# Altium PCB Main_PCB.PcbDoc
Units mm, origin at the board's own origin, x right, y up, seen from the top; angles counter-clockwise.
Board outline 54.99 x 41.53 mm, 2 copper layers (Top Layer, Bottom Layer); 25 components, 26 nets, 192 pads, 0 vias.
Unrouted connection lines stored in the file: 25.
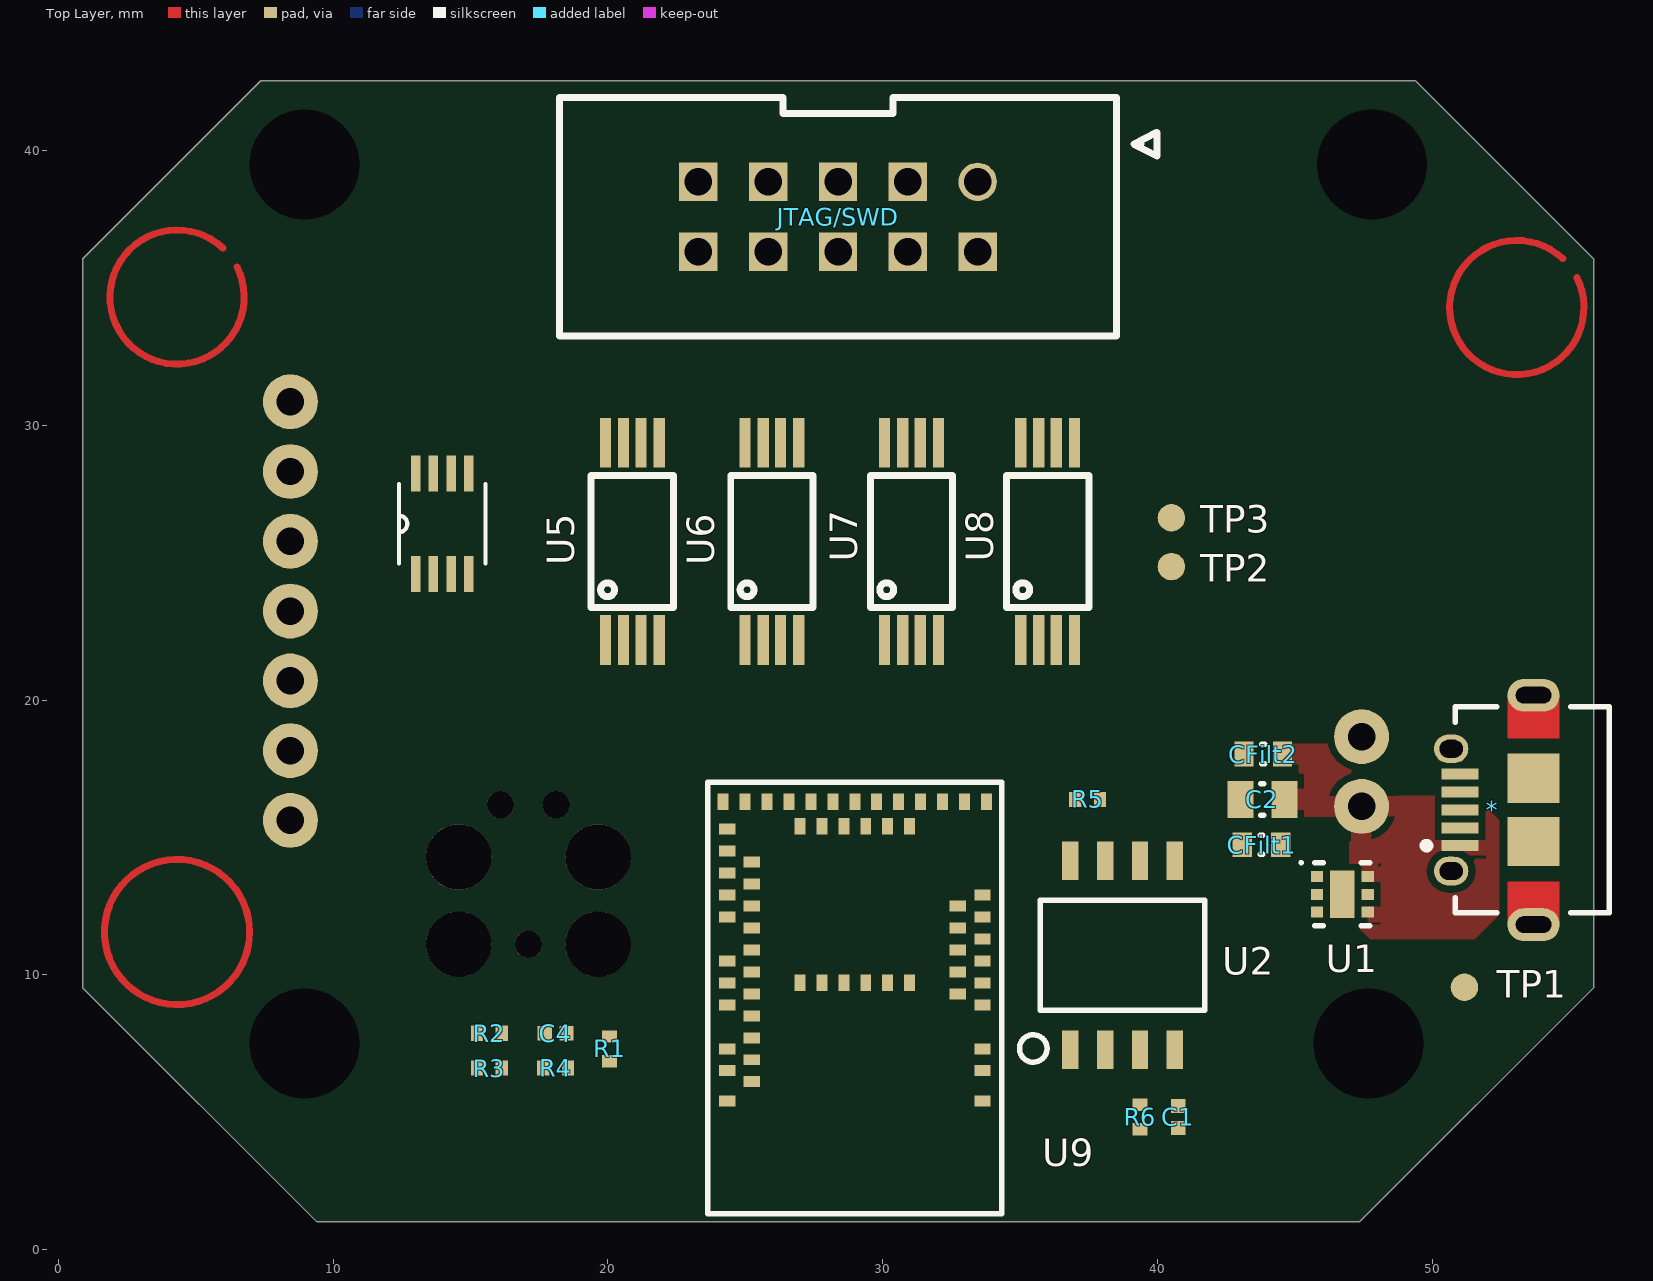
[diagram p0: Top Layer view]
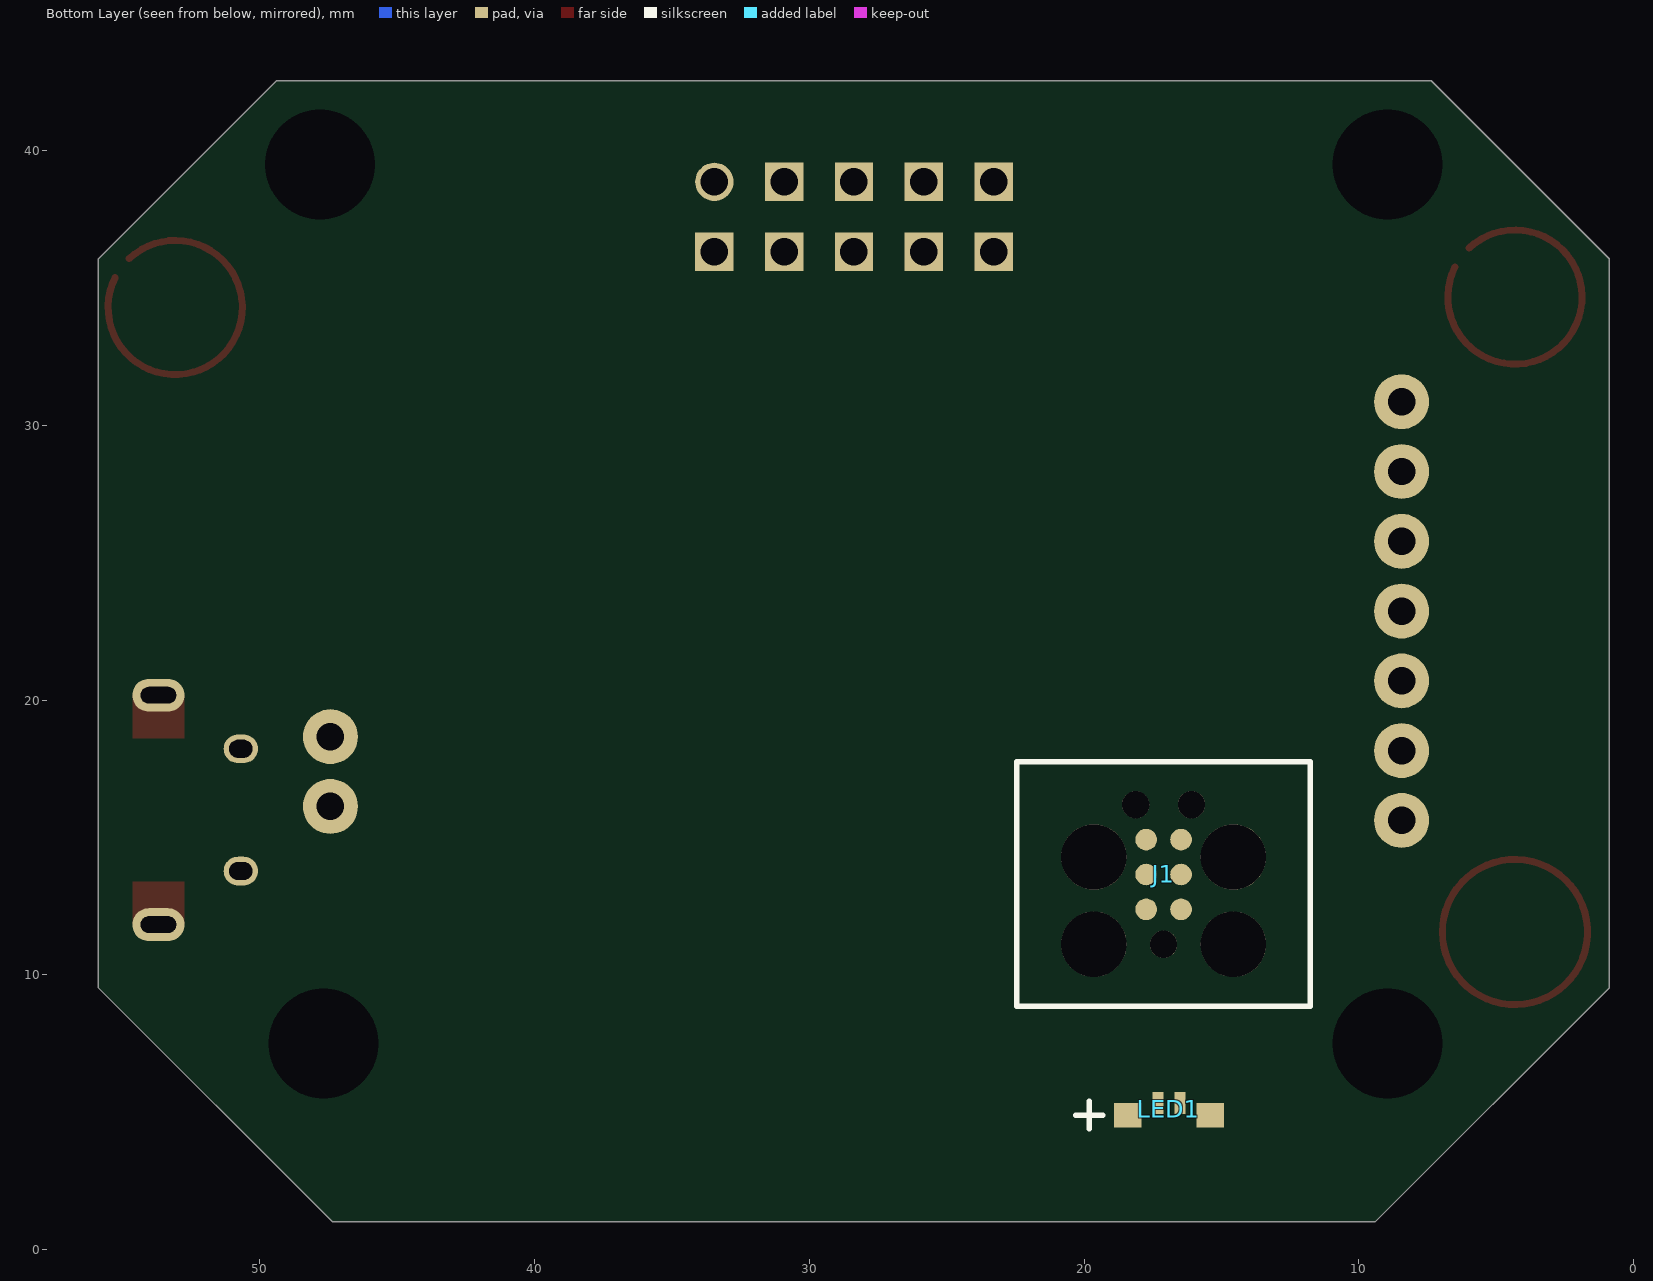
[diagram p1: Bottom Layer view, seen from below]

## Layer stack, top to bottom
Top Solder: solder mask 0.0102, Solder Resist, Dk 3.5
Top Layer: signal copper 0.0356
Dielectric 1: dielectric 0.32, FR-4, Dk 4.8
Bottom Layer: signal copper 0.0356
Bottom Solder: solder mask 0.0102, Solder Resist, Dk 3.5

## Board outline
0.889,9.525 9.398,1.016 47.371,1.016 55.88,9.525 55.88,36.068 49.403,42.545 7.366,42.545 0.889,36.068

## Design rules (kind name [scope] priority, off if disabled: settings)
Clearance [All] p1: gap=0.254 ignorepadtopadclearanceinfootprint=TRUE except(0: Arc-Hole Track-Hole SMDPad-Hole THPad-Hole Via-Hole Fill-Hole Poly-Hole Region-Hole Text-Hole)
PlaneConnect [All] p1: planeconnectstyle=Relief reliefexpansion=0.508 reliefentries=4 reliefconductorwidth=0.75 reliefairgap=0.254
PolygonConnect [All] p1: connectstyle=Relief reliefconductorwidth=0.75 reliefentries=4 polygonreliefangle="90 Angle" airgapwidth=0.254
RoutingVias [All] p1: holewidth=0.711 width=1.27 viastyle="Through Hole" minholewidth=0.711 minwidth=1.27 maxholewidth=0.711 maxwidth=1.27
SolderMaskExpansion [All] p1: expansion=0.102
Width [All] p1: maxlimit=0.254 minlimit=0.254 preferedwidth=0.254
29 further rules are at their usual default settings.

## Classes and differential pairs
component class Main_Schematic: * C1 C2 C4 CFilt1 CFilt2 J1 LED1 R1 R2 R3 R4 R5 R6 TP1 U1 U2

## Components (designator, comment, footprint, x,y, rotation, side; value= is the part's Value field where it differs from the comment)
* "CONN RCPT MICRO USB AB R/A SMD" "PCB MOUNT MICRO USB" 52.197,16.002 r90 top value="MICRO USB"
C1 "CAP CER 0.1UF 25V X7R 0402" "0402 Capacitor, IPC High" 40.767,4.826 r90 top value=100nF
C2 "CAP CER 4.7UF 50V X5R 0805" "0805 Capacitor, IPC High" 43.823,16.389 r180 top value=4.7uF
C4 "CAP CER 0.1UF 25V X7R 0402" "0402 Capacitor, IPC High" 18.097,7.874 r180 top value=100nF
CFilt1 "CAP CER 1UF 25V X5R 0603" "0603 Capacitor, IPC High" 43.793,14.732 r0 top value=1uF
CFilt2 "CAP CER 1UF 25V X5R 0603" "0603 Capacitor, IPC High" 43.853,18.034 r0 top value=1uF
J1 "TC2030-IDC PLUG-OF-NAILS" "TC2030-IDC 6PIN PLUG OF NAILS" 16.473,12.383 r90 bottom value=TC2030-IDC-FP
JTAG/SWD "JTAG-10PINPTH" 2X05_1.27MM_PTH 28.377,37.592 r180 top
LED1 "3X1MM LOW CURRENT RIGHT ANGLE RGB SMD LED" "3X1MM RT ANGLE RGB LED SMD" 16.913,4.89 r0 bottom
R1 "RES SMD 787 OHM 1% 1/16W 0402" "0402 Resistor, IPC High" 20.066,7.303 r270 top value=787
R2 "RES SMD 330 OHM 1% 1/16W 040" "0402 Resistor, IPC High" 15.684,7.874 r0 top value=330
R3 "RES SMD 432 OHM 1% 1/16W 0402" "0402 Resistor, IPC High" 15.684,6.604 r0 top value=432
R4 "RES SMD 4.75K OHM 1% 1/16W 0402" "0402 Resistor, IPC High" 18.097,6.604 r0 top value=4.75K
R5 "RES SMD 10K OHM 1% 1/16W 0402" "0402 Resistor, IPC High" 37.465,16.383 r0 top value=10k
R6 "RES SMD 10K OHM 1% 1/16W 0402" "0402 Resistor, IPC High" 39.37,4.826 r90 top value=10k
TP1 "TEST POINT~RND~1.0mm" "TEST POINT~RND~1.0mm" 51.181,9.547 r90 top
TP2 "TEST POINT~RND~1.0mm" "TEST POINT~RND~1.0mm" 40.513,24.859 r90 top
TP3 "TEST POINT~RND~1.0mm" "TEST POINT~RND~1.0mm" 40.513,26.637 r90 top
U1 "IC REG LIN POS 3.3V 300MA LOW IQ WIDE INPUT" SON65P200X80_HS-7N 46.736,12.932 r0 top value=NCP718AMT330TBG
U2 "IC FLASH 8M SPI 133MHZ 8SOIC" 8-SOP 38.735,10.719 r90 top value=IS25LP08D
U5 "SN74LVC2T45DCTT" SSOP-8 20.892,25.781 r90 top
U6 "SN74LVC2T45DCTT" SSOP-8 25.971,25.781 r90 top
U7 "SN74LVC2T45DCTT" SSOP-8 31.051,25.781 r90 top
U8 "SN74LVC2T45DCTT" SSOP-8 36.005,25.781 r90 top
U9 "MDBT50Q" MDBT50Q 29.337,8.709 r180 top

## Footprints (in the part's own frame and the unit in brackets; to place one, negate y for a bottom-side part, rotate by r counter-clockwise, add the part's x,y. Pads: shape width x height; smd on the part's side, far side on the other; paste and mask are expansions set on the pad)
2X05_1.27MM_PTH [mm]
  round 1.4 hole 1.001: 1(-5.08,-1.27)
  rect 1.4x1.4 hole 1.001: 2(-5.08,1.27) 3(-2.54,-1.27) 4(-2.54,1.27) 5(0,-1.27) 6(0,1.27) 7(2.54,-1.27) 8(2.54,1.27) 9(5.08,-1.27) 10(5.08,1.27)
  silkscreen extent -11.61,-4.34 10.13,4.34
"3X1MM RT ANGLE RGB LED SMD" [mm] "3X1MM RT ANGLE RGB LED SMD"
  rect 1x0.9 smd: 1(-1.5,0) 2(1.5,0)
  rect 0.4x0.8 smd: 3(0.4,-0.45) 4(-0.4,-0.45)
  silkscreen extent 2.4,-0.5 3.4,0.5
8-SOP [mm] "8-SOP BODY 5.28x5.28"
  rect 1.4x0.6 smd: 1(-3.44,1.905) 2(-3.44,0.635) 3(-3.44,-0.635) 4(-3.44,-1.905) 5(3.44,-1.905) 6(3.44,-0.635) 7(3.44,0.635) 8(3.44,1.905)
  silkscreen extent -3.9,-3 2,3.75, body extent -3.91,-2.64 3.91,2.64, height 2.61
"0402 Capacitor, IPC High" [mm] "0402 Capacitor, IPC High"
  rect 0.52x0.52 smd: 1(-0.4,0) 2(0.4,0)
  body extent -0.55,-0.3 0.55,0.3, height 0.7
"0402 Resistor, IPC High" [mm] "0402 Resistor, IPC High"
  rect 0.45x0.55 smd: 1(-0.45,0) 2(0.45,0)
  body extent -0.52,-0.27 0.53,0.28, height 0.4
"0603 Capacitor, IPC High" [mm] "0603 Capacitor, IPC High"
  rect 0.7x0.9 smd: 1(-0.7,0) 2(0.7,0)
  silkscreen extent -0.05,-0.35 0.05,0.35, body extent -0.87,-0.47 0.88,0.48, height 1
"0805 Capacitor, IPC High" [mm] "0805 Capacitor, IPC High"
  rect 0.95x1.35 smd: 1(-0.8,0) 2(0.8,0)
  silkscreen extent -0.05,-0.58 0.05,0.58, body extent -1.1,-0.72 1.1,0.72, height 1.55
MDBT50Q [mm]
  rect 0.6x0.4 smd: 1(-4.3,3.3) 2(-4.3,2.2) 3(-4.3,1.4) 4(-4.3,-0.2) 5(-3.4,-0.6) 6(-4.3,-1) 7(-3.4,-1.4) 8(-4.3,-1.8) 9(-3.4,-2.2) 10(-4.3,-2.6) 11(-3.4,-3) 12(-4.3,-3.4) 13(-3.4,-3.8) 14(-4.3,-4.2) 34(5,-6.6) 35(5,-5.8) 36(4.1,-5.4) 37(5,-5) 38(4.1,-4.6) 39(5,-4.2) 40(4.1,-3.8) 41(5,-3.4) 42(4.1,-3) 43(4.1,-2.2) 44(5,-1.8) 45(4.1,-1.4) 46(5,-1) 47(4.1,-0.6) 48(5,-0.2) 49(4.1,0.2) 50(4.1,1) 51(5,1.4) 52(4.1,1.8) 53(5,2.2) 54(4.1,2.6) 55(5,3.3)
  rect 0.4x0.6 smd: 15(-4.45,-7.6) 16(-3.65,-7.6) 17(-2.85,-7.6) 18(-2.05,-7.6) 19(-1.65,-6.7) 20(-1.25,-7.6) 21(-0.85,-6.7) 22(-0.45,-7.6) 23(-0.05,-6.7) 24(0.35,-7.6) 25(0.75,-6.7) 26(1.15,-7.6) 27(1.55,-6.7) 28(1.95,-7.6) 29(2.35,-6.7) 30(2.75,-7.6) 31(3.55,-7.6) 32(4.35,-7.6) 33(5.15,-7.6) 56(-1.65,-1) 57(-0.85,-1) 58(-0.05,-1) 59(0.75,-1) 60(1.55,-1) 61(2.35,-1)
  silkscreen extent -5,-8.3 5.7,7.4
"PCB MOUNT MICRO USB" [mm] "PCB MOUNT MICRO USB"
  rect 0.4x1.35 smd: 1(-1.3,1.175) 2(-0.65,1.175) 3(0,1.175) 4(0.65,1.175) 5(1.3,1.175)
  oval 1.05x1.25 hole 0.65 slot 0.85 at 90 deg: 6(-2.225,1.5) 7(2.225,1.5)
  oval 1.2x1.9 hole 0.6 slot 1.3 at 90 deg: 8(-4.175,-1.5) 11(4.175,-1.5)
  rect 1.8x1.9 smd: 9(-1.15,-1.5) 10(1.15,-1.5)
  Top Layer region: -2.6,-0.55 -4.175,-0.55 -4.175,-2.45 -2.6,-2.45
  Top Layer region: 2.6,-2.45 4.175,-2.45 4.175,-0.55 2.6,-0.55
  silkscreen extent -3.75,-4.25 3.75,2.52, body extent -4.32,-4.25 4.32,1.64, height 2.74
SON65P200X80_HS-7N [mm] "SON, 6-Leads, Body 2.00x2.00mm, Pitch 0.65mm, Thermal Pad 1.60x0.78mm, IPC Medium Density"
  rect 0.45x0.4 smd mask+0.051: 1(-0.925,0.65) 2(-0.925,0) 3(-0.925,-0.65) 4(0.925,-0.65) 5(0.925,0) 6(0.925,0.65)
  rect 0.9x1.72 smd mask+0.051: 7(0,0)
  silkscreen extent -1.55,-1.15 1,1.2, body extent -1,-1 1,1, height 0.8
SSOP-8 [mil]
  rect 71x16 smd: 1(-141.5,38.5) 2(-141.5,12.5) 3(-141.5,-12.5) 4(-141.5,-38.5) 5(141.5,-38.5) 6(141.5,-12.5) 7(141.5,12.5) 8(141.5,38.5)
  silkscreen extent -95,-59 94,59
"TC2030-IDC 6PIN PLUG OF NAILS" [mil] "TC2030-IDC 6PIN PLUG OF NAILS"
  round 30.98 smd paste-3937.01: 1(0,0) 2(0,50) 3(50,0) 4(50,50) 5(100,0) 6(100,50)
  round 93.5 hole 93.5 unplated: ""(-50,-75) ""(-50,125) ""(75,-75) ""(75,125)
  round 39 hole 39 unplated: ""(-50,25) ""(150,-15) ""(150,65)
  silkscreen extent -139,-185 212,236
"TEST POINT~RND~1.0mm" [mm] "TEST POINT~RND~1.0mm"
  round 1 smd paste-1: 1(0,0)

## Part data
*: library part 70888-1, Rockford Part Number=1040-70888
C1 C4: library part 1425-70000-7, Rockford Part Number=1425-70000, Tolerance=10%
C2: library part 1425-59504-8, Rockford Part Number=1425-59504, Tolerance=10%
CFilt1 CFilt2: library part 1425-54589-11, Capacitance=1uF, Case Code (Imperial)=0603, Case Code (Metric)=1608, Tolerance=10%, Voltage Rating=25V, Thickness=0.87mm
J1: library part 74346-1, Rockford Part Number=1565-74346
LED1: library part 1440-57764-7, Rockford Part Number=1440-57764
R1: library part 70332-5, Rockford Part Number=1450-70332, Tolerance=1%
R2: library part 70331-5, Rockford Part Number=1450-70331, Tolerance=1%
R3: library part 70330-5, Rockford Part Number=1450-70330, Tolerance=1%
R4: library part 70338-5, Rockford Part Number=1450-70338, Tolerance=1%
R5 R6: library part 1450-70006-3, Rockford Part Number=1450-70006, Tolerance=1%
TP1 TP2 TP3: library part MISC-00017-1
U1: library part 74165-4, Rockford Part Number=1580-74165
U2: library part 73358-1, Rockford Part Number=1280-73358

## Free pads (board coordinates)
  round 1.524 hole 4: 1(8.954,7.493) 1(8.954,39.497) 1(47.688,7.493) 1(47.816,39.497)
  rect 0.356x1.321 smd: 1(13.005,24.587) 2(13.64,24.587) 3(14.3,24.587) 4(14.935,24.587) 5(14.935,28.245) 6(14.3,28.245) 7(13.64,28.245) 8(13.005,28.245)
  round 2 hole 1: 2(8.445,15.621) 2(8.445,18.161) 2(8.445,20.701) 2(8.445,23.241) 2(8.445,25.781) 2(8.445,28.321) 2(8.445,30.861) 2(47.434,16.129) 2(47.434,18.669)

## Nets (pads, with @x,y where several pads share a name; then routed paths per layer and width w, separated by ;. In a path a pad name is that pad's centre, name@x,y a point inside that pad or via, vN(x,y) a via of type N, cw(c..) or ccw(c..) an arc to the next point about the centre after c; other vN are vias at no path point)
+3.3V: CFilt1.2 J1.1 LED1.2 R4.2 U1.1
CLK: 
CS: 
DGND: C1.2 U2.4
GND: *.5 C2.2 C4.1 CFilt1.1 CFilt2.1 J1.5 pad.2@47.434,18.669 U1.3 U1.7
HOLD/RESET: 
LED_BLU: R2.1
LED_RED: R3.1
MCU_3.3VD: C1.1 R5.1 R6.1 U2.8
MCU_-RESET: C4.2 J1.3 R4.1
MCU_SPI_-CS_MEM: U2.1
MCU_SPI_MISO: U2.2
MCU_SPI_MOSI: U2.5
MCU_SPI_SCLK: U2.6
MCU_SWCLK: J1.4
NetLED1_1: LED1.1 R3.2
NetLED1_3: LED1.3 R1.2
NetLED1_4: LED1.4 R2.2
NetR5_2: R5.2 U2.7
NetR6_2: R6.2 U2.3
S0: 
SI: 
SWDIO_LED_GRN: J1.2 R1.1
VCC: 
VDD: *.1 C2.1 CFilt2.2 pad.2@47.434,16.129 TP1.1 U1.4 U1.6 | length 0.4
  Top Layer w0.254: pad.2@47.175,16.389 pad.2@47.434,16.129
WP: 
pads on no net: *.2 *.3 *.4 *.6 *.7 *.8 *.9 *.10 *.11 J1. J1.6 JTAG/SWD.1 JTAG/SWD.2 JTAG/SWD.3 JTAG/SWD.4 JTAG/SWD.5 JTAG/SWD.6 JTAG/SWD.7 JTAG/SWD.8 JTAG/SWD.9 JTAG/SWD.10 TP2.1 TP3.1 U1.2 U1.5 U5.1 U5.2 U5.3 U5.4 U5.5 U5.6 U5.7 U5.8 U6.1 U6.2 U6.3 U6.4 U6.5 U6.6 U6.7 U6.8 U7.1 U7.2 U7.3 U7.4 U7.5 U7.6 U7.7 U7.8 U8.1 U8.2 U8.3 U8.4 U8.5 U8.6 U8.7 U8.8 U9.1 U9.2 U9.3 U9.4 U9.5 U9.6 U9.7 U9.8 U9.9 U9.10 U9.11 U9.12 U9.13 U9.14 U9.15 U9.16 U9.17 U9.18 U9.19 U9.20 U9.21 U9.22 U9.23 U9.24 U9.25 U9.26 U9.27 U9.28 U9.29 U9.30 U9.31 U9.32 U9.33 U9.34 U9.35 U9.36 U9.37 U9.38 U9.39 U9.40 U9.41 U9.42 U9.43 U9.44 U9.45 U9.46 U9.47 U9.48 U9.49 U9.50 U9.51 U9.52 U9.53 U9.54 U9.55 U9.56 U9.57 U9.58 U9.59 U9.60 U9.61
copper on no net: | length 45.6
  Top Layer w0.254: 5.992,36.45 ccw(c4.318,34.671) 6.503,35.763 ; 54.76,36.069 ccw(c53.086,34.29) 55.271,35.382 ; 6.961,11.557 ccw(c4.318,11.557) 6.961,11.557

## Polygon pours and split planes (outlines as drawn)
VDD on Top Layer "Top Layer-VDD" (solid, pour order 10): 48.387,17.526 47.498,18.415 43.942,18.415 43.942,15.748 48.387,15.748
VDD on Top Layer "Top Layer-VDD 1" (solid, pour order 8): 52.451,15.621 51.562,16.51 48.26,16.51 46.99,15.24 46.99,12.065 47.752,11.303 51.562,11.303 52.451,12.192

## Other copper
Top Layer:
  pour cut-out: 19.05,43.269

## Silkscreen, mask and mechanical layers (free items; w line width, h text height)
Top Overlay:
  lines w0.152: 12.395,24.968 12.395,26.111 ; 12.395,27.864 12.395,26.721 ; 15.545,24.968 15.545,27.864 ; 12.395,26.111 ccw(c12.395,26.416) 12.395,26.721 ; 12.395,26.111 12.395,26.721
Mechanical 4:
  lines w0: 12.395,24.968 12.395,26.111 ; 12.395,24.968 15.545,24.968 ; 12.395,24.968 12.395,26.111 ; 12.395,24.968 15.545,24.968 ; 12.395,26.111 ccw(c12.395,26.416) 12.395,26.721 ; 12.395,26.111 ccw(c12.395,26.416) 12.395,26.721 ; 12.395,26.111 12.395,26.721 ; 12.395,26.111 12.395,26.721 ; 12.395,26.721 12.395,27.864 ; 12.395,26.721 12.395,27.864 ; 12.395,27.864 15.545,27.864 ; 12.395,27.864 15.545,27.864 ; 12.852,24.282 12.852,24.968 ; 12.852,24.282 13.157,24.282 ; 12.852,24.282 12.852,24.968 ; 12.852,24.282 13.157,24.282 ; 12.852,24.968 13.157,24.968 ; 12.852,24.968 13.157,24.968 ; 12.852,27.864 13.157,27.864 ; 12.852,27.864 12.852,28.55 ; 12.852,27.864 13.157,27.864 ; 12.852,27.864 12.852,28.55 ; 12.852,28.55 13.157,28.55 ; 12.852,28.55 13.157,28.55 ; 13.157,24.282 13.157,24.968 ; 13.157,24.282 13.157,24.968 ; 13.157,27.864 13.157,28.55 ; 13.157,27.864 13.157,28.55 ; 13.487,24.282 13.487,24.968 ; 13.487,24.282 13.792,24.282 ; 13.487,24.282 13.487,24.968 ; 13.487,24.282 13.792,24.282 ; 13.487,24.968 13.792,24.968 ; 13.487,24.968 13.792,24.968 ; 13.487,27.864 13.792,27.864 ; 13.487,27.864 13.487,28.55 ; 13.487,27.864 13.792,27.864 ; 13.487,27.864 13.487,28.55 ; 13.487,28.55 13.792,28.55 ; 13.487,28.55 13.792,28.55 ; 13.792,24.282 13.792,24.968 ; 13.792,24.282 13.792,24.968 ; 13.792,27.864 13.792,28.55 ; 13.792,27.864 13.792,28.55 ; 14.148,24.282 14.148,24.968 ; 14.148,24.282 14.453,24.282 ; 14.148,24.282 14.148,24.968 ; 14.148,24.282 14.453,24.282 ; 14.148,24.968 14.453,24.968 ; 14.148,24.968 14.453,24.968 ; 14.148,27.864 14.453,27.864 ; 14.148,27.864 14.148,28.55 ; 14.148,27.864 14.453,27.864 ; 14.148,27.864 14.148,28.55 ; 14.148,28.55 14.453,28.55 ; 14.148,28.55 14.453,28.55 ; 14.453,24.282 14.453,24.968 ; 14.453,24.282 14.453,24.968 ; 14.453,27.864 14.453,28.55 ; 14.453,27.864 14.453,28.55 ; 14.783,24.282 14.783,24.968 ; 14.783,24.282 15.088,24.282 ; 14.783,24.282 14.783,24.968 ; 14.783,24.282 15.088,24.282 ; 14.783,24.968 15.088,24.968 ; 14.783,24.968 15.088,24.968 ; 14.783,27.864 15.088,27.864 ; 14.783,27.864 14.783,28.55 ; 14.783,27.864 15.088,27.864 ; 14.783,27.864 14.783,28.55 ; 14.783,28.55 15.088,28.55 ; 14.783,28.55 15.088,28.55 ; 15.088,24.282 15.088,24.968 ; 15.088,24.282 15.088,24.968 ; 15.088,27.864 15.088,28.55 ; 15.088,27.864 15.088,28.55 ; 15.545,24.968 15.545,27.864 ; 15.545,24.968 15.545,27.864

## Text inside footprints (layer, text, board x,y; h text height)
*: Mechanical 1 "PCB EDGE" at 54.697,21.702 h1 r90
JTAG/SWD: Mechanical 15 "1" at 35.616,39.218 h0.76